# EAGLE board HorusBoard (EAGLE 8.4.1)
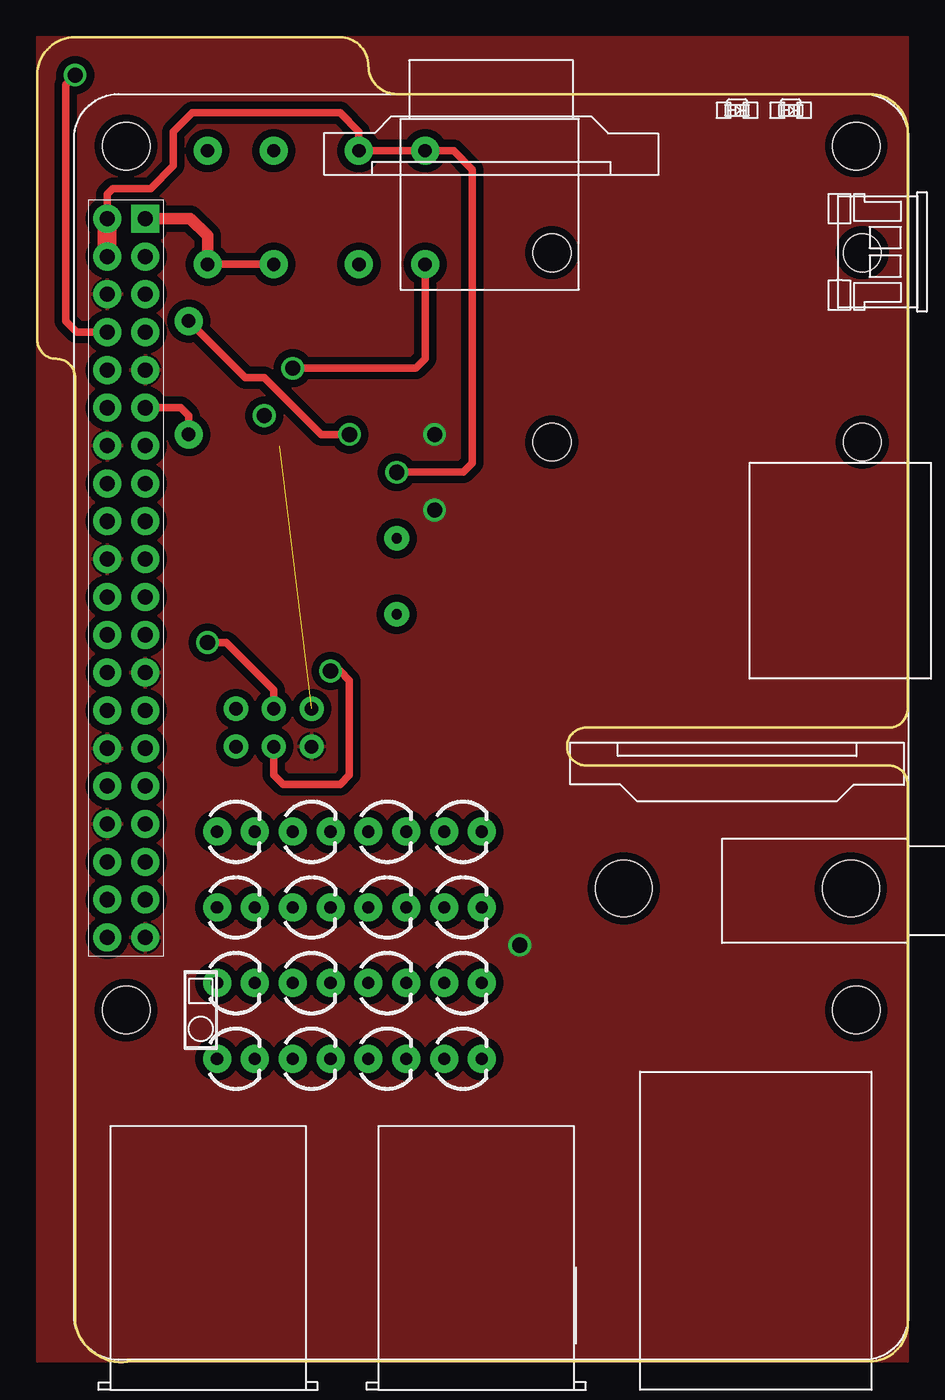
[diagram p0: board, top side]
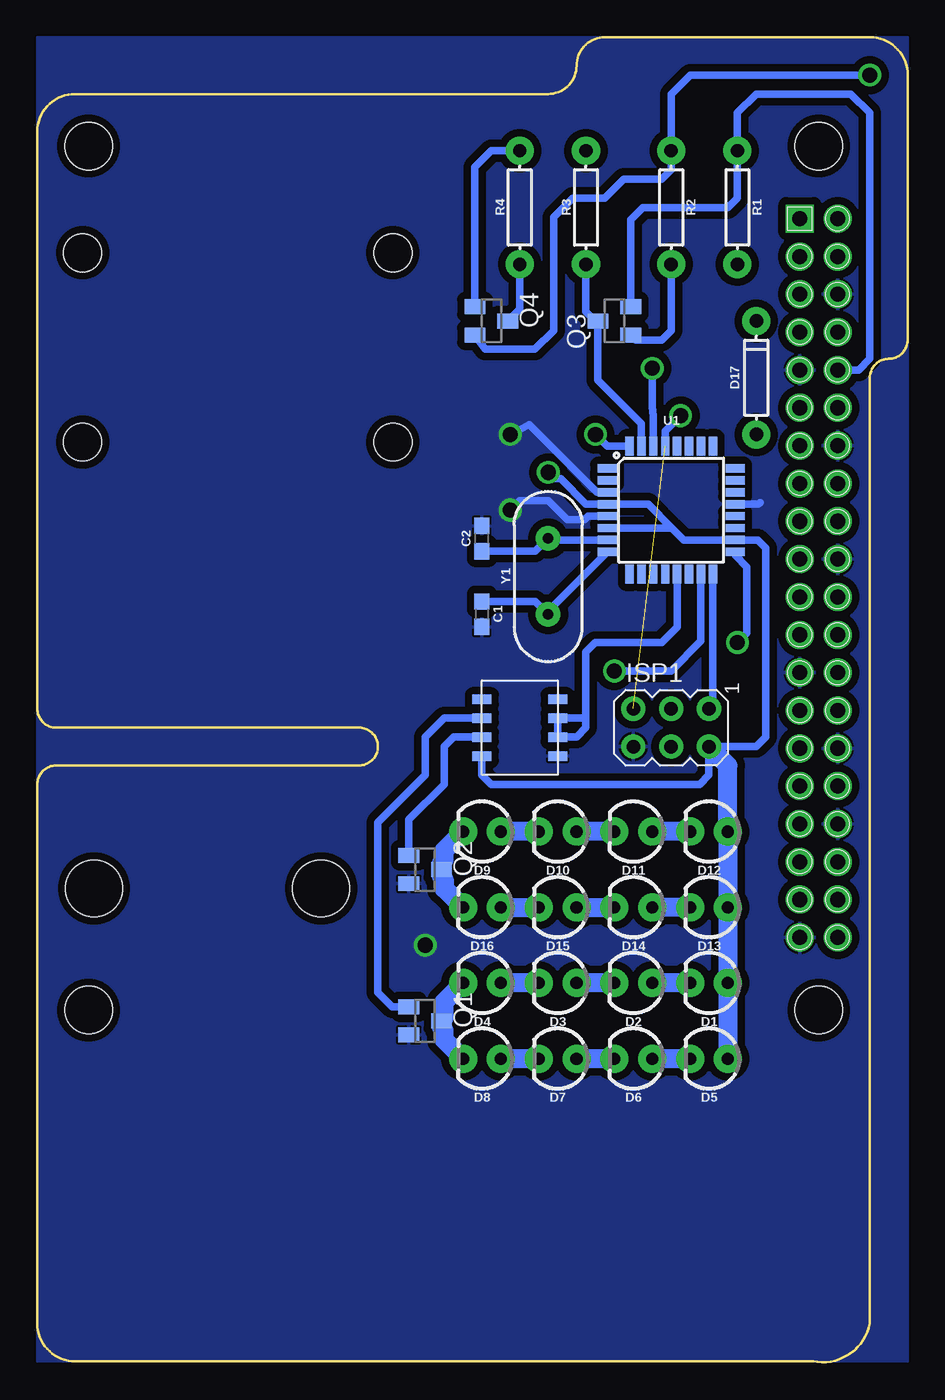
[diagram p1: board, bottom side, seen from below]

Size 58.42 x 88.96 mm. Coordinates in mm from the lower left corner, seen from the top.
Outline: 6.35,0.06 arc-90 2.54,2.6 2.54,66.1 arc90 1.27,67.37 arc-90 0,68.64 0,86.42 arc-90 2.54,88.96 20.32,88.96 arc-90 22.22,87.06 arc90 24.13,85.15 55.88,85.15 arc-90 58.42,82.61 58.42,43.88 arc-90 57.15,42.61 36.83,42.61 arc90 35.56,41.34 arc90 36.83,40.07 57.15,40.07 arc-90 58.42,38.8 58.42,2.6 arc-90 55.88,0.06 6.35,0.06
Copper layers (1*16): Top 0.035mm / dielectric 1.5mm / Bottom 0.035mm
Design rules "OthermillDRC_30_deg_v2": minimum track width 6mil, minimum drill 0.8mm, track to track 6mil, track to pad 6mil, pad to pad 6mil, via to via 6mil, smd to smd 0mil, copper to edge 0mil, drill to drill 6mil, minimum pad ring 10mil, minimum via ring 10mil, stop-mask expansion 1mil, vias tented up to drill 30mil, thermal gap 6mil
Holes 3.81 mm at 54.61,31.81 39.37,31.81
Holes 2.54 mm at 55.37,74.48 34.54,74.48 34.54,61.78 55.37,61.78

## Footprints (pad centres in the part's own frame; a part is rotated, then mirrored left to right if it is on the bottom)
0603 = smd 1.1 x 1: 1 -0.85,0; 2 0.85,0
LED_3MM = drill 0.813 pad 1.88: A -1.27,0; K 1.27,0
DIODE-1N4148 = drill 0.9 pad 1.88: A -3.81,0; C 3.81,0
AVRISP = drill 0.9 pad 1.626: 1 -1.27,2.54; 2 1.27,2.54; 3 -1.27,0; 4 1.27,0; 5 -1.27,-2.54; 6 1.27,-2.54
SOT23 = smd 1 x 1.4: 1 -0.95,-1.1; 2 0.95,-1.1; 3 0,1.1
AXIAL-0.3 = drill 0.9 pad 1.88: P$1 -3.81,0; P$2 3.81,0
TQFP32-08 = smd 1.27 x 0.559: 1 -4.293,2.8; 2 -4.293,2; 3 -4.293,1.2; 4 -4.293,0.4; 5 -4.293,-0.4; 6 -4.293,-1.2; 7 -4.293,-2; 8 -4.293,-2.8; 17 4.293,-2.8; 18 4.293,-2; 19 4.293,-1.2; 20 4.293,-0.4; 21 4.293,0.4; 22 4.293,1.2; 23 4.293,2; 24 4.293,2.8 | smd 0.559 x 1.27: 9 -2.8,-4.293; 10 -2,-4.293; 11 -1.2,-4.293; 12 -0.4,-4.293; 13 0.4,-4.293; 14 1.2,-4.293; 15 2,-4.293; 16 2.8,-4.293; 25 2.8,4.293; 26 2,4.293; 27 1.2,4.293; 28 0.4,4.293; 29 -0.4,4.293; 30 -1.2,4.293; 31 -2,4.293; 32 -2.8,4.293
8-SOIC = smd 1.27 x 0.635: P$1 -2.54,1.27; P$2 -2.54,0; P$3 -2.54,-1.27; P$4 -2.54,-2.54; P$5 2.54,-2.54; P$6 2.54,-1.27; P$7 2.54,0; P$8 2.54,1.27
RASPBERRY_PI_3 = drill 1.016 pad 1.88 square: 1 -23.24,32.27 | drill 1.016 pad 1.88: 2 -25.78,32.27; 3 -23.24,29.73; 4 -25.78,29.73; 5 -23.24,27.19; 6 -25.78,27.19; 7 -23.24,24.65; 8 -25.78,24.65; 9 -23.24,22.11; 10 -25.78,22.11; 11 -23.24,19.57; 12 -25.78,19.57; 13 -23.24,17.03; 14 -25.78,17.03; 15 -23.24,14.49; 16 -25.78,14.49; 17 -23.24,11.95; 18 -25.78,11.95; 19 -23.24,9.41; 20 -25.78,9.41; 21 -23.24,6.87; 22 -25.78,6.87; 23 -23.24,4.33; 24 -25.78,4.33; 25 -23.24,1.79; 26 -25.78,1.79; 27 -23.24,-0.75; 28 -25.78,-0.75; 29 -23.24,-3.29; 30 -25.78,-3.29; 31 -23.24,-5.83; 32 -25.78,-5.83; 33 -23.24,-8.37; 34 -25.78,-8.37; 35 -23.24,-10.91; 36 -25.78,-10.91; 37 -23.24,-13.45; 38 -25.78,-13.45; 39 -23.24,-15.99; 40 -25.78,-15.99 | hole 3.175: -24.51,37.14; 24.49,37.14; 24.49,-20.86; -24.51,-20.86
HC49US = drill 0.7 pad 1.651: 1 -2.54,0; 2 2.54,0

## Placement (x,y rotation side)
C1  22pF  [0603]  28.57,50.23 270 bottom
C2  22pF  [0603]  28.57,55.31 90 bottom
D1  [LED_3MM]  13.34,25.46 180 bottom
D2  [LED_3MM]  18.41,25.46 180 bottom
D3  [LED_3MM]  23.49,25.46 180 bottom
D4  [LED_3MM]  28.57,25.46 180 bottom
D5  [LED_3MM]  13.34,20.38 180 bottom
D6  [LED_3MM]  18.41,20.38 180 bottom
D7  [LED_3MM]  23.49,20.38 180 bottom
D8  [LED_3MM]  28.57,20.38 180 bottom
D9  [LED_3MM]  28.57,35.62 180 bottom
D10  [LED_3MM]  23.49,35.62 180 bottom
D11  [LED_3MM]  18.41,35.62 180 bottom
D12  [LED_3MM]  13.34,35.62 180 bottom
D13  [LED_3MM]  13.34,30.54 180 bottom
D14  [LED_3MM]  18.41,30.54 180 bottom
D15  [LED_3MM]  23.49,30.54 180 bottom
D16  [LED_3MM]  28.57,30.54 180 bottom
D17  200mA/100V/1V  [DIODE-1N4148]  10.16,66.1 90 bottom
ISP1  AVRISP-6  [AVRISP]  15.88,42.61 270 bottom
Q1  [SOT23]  32.38,22.92 270 bottom
Q2  [SOT23]  32.38,33.08 270 bottom
Q3  [SOT23]  19.68,69.91 90 bottom
Q4  [SOT23]  27.94,69.91 270 bottom
R1  1k  [AXIAL-0.3]  11.43,77.53 270 bottom
R2  1k  [AXIAL-0.3]  15.88,77.53 270 bottom
R3  1k  [AXIAL-0.3]  21.59,77.53 90 bottom
R4  1k  [AXIAL-0.3]  26.04,77.53 90 bottom
U1  ATMEGA328P_TQFP  [TQFP32-08]  15.88,57.21 0 bottom
U$1  TC4427  [8-SOIC]  26.04,41.97 180 bottom
U$2  RASPBERRY_PI_3  [RASPBERRY_PI_3]  30.48,44.51 0 top
Y1  16MHz  [HC49US]  24.13,52.77 90 bottom

## Library data of the parts
C1 C2 = SparkFun-Capacitors; PROD_ID: CAP-07876
D1-D16 = SparkFun-LED; PROD_ID: DIO-08794
D17 = SparkFun-DiscreteSemi; PROD_ID: DIO-08378
ISP1 Q1-Q4 = adafruit
R1-R4 = SparkFun-Resistors; PROD_ID: RES-08380
U1 = SparkFun-IC-Microcontroller; PROD_ID: IC-09069
U$1 U$2 = owen
Y1 = SparkFun-Clocks; PROD_ID: XTAL-08181; SF_ID: COM-00536

## Nets
3.3V: Q3.1 R1.P$2 R2.P$2 U$2.1
5V: D1.A D5.A D12.A D13.A ISP1.2 Q4.1 R3.P$2 R4.P$2 U1.4 U1.6 U1.18 U$1.P$8 U$2.2 U$2.4
GND: C1.2 C2.2 ISP1.6 Q1.2 Q2.2 U1.3 U1.5 U1.21 U$1.P$1 U$2.6 U$2.9 U$2.14 U$2.20 U$2.25 U$2.30 U$2.34 U$2.39
LIGHT: U1.13 U$1.P$2 U$1.P$3
MISO: ISP1.1 U1.16
MOSI: ISP1.4 U1.15
N$1: D4.K D8.K Q1.3
N$2: D9.K D16.K Q2.3
N$3: Q1.1 U$1.P$6
N$4: D17.A U$2.11
N$5: Q2.1 U$1.P$7
N$7: U1.20
N$9: C2.1 U1.7 Y1.2
N$10: C1.1 U1.8 Y1.1
N$11: D1.K D2.A
N$12: D2.K D3.A
N$13: D3.K D4.A
N$14: D7.K D8.A
N$15: D9.A D10.K
N$16: D6.K D7.A
N$17: D10.A D11.K
N$18: D14.K D15.A
N$19: D15.K D16.A
N$20: D11.A D12.K
N$21: D5.K D6.A
N$22: D13.K D14.A
N$23: D17.C U1.32
RESET: ISP1.5 U1.29
RX_3.3V: Q3.2 R1.P$1 U$2.10
RX_5V: Q4.3 R4.P$1 U1.30
SCK: ISP1.3 U1.17
TX_3.3V: Q4.2 R2.P$1 U$2.8
TX_5V: Q3.3 R3.P$1 U1.31

## Tracks (layer width: path | path; a pad name or v marks a point on that pad's centre or on a via)
3.3V
  Top 0.508: R1.P$2 R2.P$2
  Top 0.762: U$2.1 10.28,76.78 11.43,75.63 R1.P$2
  Bottom 0.508: R2.P$2 15.88,69.28 16.51,68.64 18.27,68.64 Q3.1
5V  (via drill 1.02)
  Top 0.508: U$2.2 4.7,78.42 5.07,78.8 7.61,78.8 9.14,80.33 9.14,82.61 10.41,83.88 20.32,83.88 21.59,82.61 R3.P$2 R4.P$2 27.94,81.34 29.21,80.07 29.21,60.39 28.57,59.75 v24.13,59.75
  Top 1.27: U$2.4 U$2.2
  Bottom 0.508: Q4.1 29.04,80.24 27.94,81.34 R4.P$2 | 15.82,56.01 U1.6 | 15.82,56.01 15.02,55.21 U1.18 10.07,55.21 9.53,54.67 9.53,41.97 10.16,41.34 ISP1.2 13.34,39.43 13.97,38.8 27.94,38.8 28.57,39.43 U$1.P$8 | 15.82,56.01 17.42,57.61 U1.4 20.4,57.61 20.4,57.62 21.59,57.62 23.29,59.32 23.7,59.32 v24.13,59.75
  Bottom 1.27: ISP1.2 12.07,40.07 D12.A D13.A D1.A D5.A
GND  (via drill 1.02)
  Bottom 0.508: U1.21 10.01,57.61 9.91,57.72 | U1.5 21.44,56.81 21.68,56.58 22.86,56.58 24.13,57.85 26.04,57.85 v26.67,57.21 | 22.22,59.75 22.2,59.75 20.86,58.41 U1.3 | 21.89,59.45 25.4,62.96 v26.67,62.29
  other vias: 32.38,28
  pour Bottom (isolate 0.508): 0,0.06 0,88.96 58.42,88.96 58.42,0.06
  pour Top (isolate 0.508): 0,0.06 0,88.96 58.42,88.96 58.42,0.06
LIGHT
  Bottom 0.508: U1.13 15.48,49.36 16.51,48.32 20.95,48.32 21.59,47.69 21.59,43.24 | 21.59,43.24 21.59,42.61 22.22,41.97 U$1.P$2 U$1.P$3 21.59,43.24
MISO
  Bottom 0.508: U1.16 13.07,44.14 ISP1.1
MOSI  (via drill 1.02)
  Top 0.508: ISP1.4 15.88,39.43 16.51,38.8 20.32,38.8 20.95,39.43 20.95,45.78 20.32,46.42 v19.68,46.42
  Bottom 0.508: v19.68,46.42 15.88,46.42 13.88,48.42 U1.15
N$1
  Bottom 1.27: D4.K 31.11,24.19 31.11,23.09 Q1.3 31.29,22.46 31.11,22.29 31.11,21.65 D8.K
N$2
  Bottom 1.27: D9.K 31.11,34.35 31.11,33.72 31.29,33.55 Q2.3 31.29,32.62 31.11,32.45 31.11,31.81 D16.K
N$3
  Bottom 0.508: U$1.P$6 31.11,43.24 32.38,41.97 32.38,39.43 35.56,36.26 35.56,24.83 34.6,23.87 Q1.1
N$4
  Top 0.508: U$2.11 9.64,64.08 10.16,63.56 D17.A
N$5
  Bottom 0.508: U$1.P$7 30.48,41.97 31.11,41.34 31.11,38.8 33.48,36.43 Q2.1
N$9
  Bottom 0.508: U1.7 24.04,55.21 Y1.2 24.98,54.46 C2.1
N$10
  Bottom 0.508: U1.8 24.13,50.45 Y1.1 24.98,51.08 C1.1
N$11
  Bottom 1.27: D1.K D2.A
N$12
  Bottom 1.27: D2.K D3.A
N$13
  Bottom 1.27: D3.K D4.A
N$14
  Bottom 1.27: D7.K D8.A
N$15
  Bottom 1.27: D10.K D9.A
N$16
  Bottom 1.27: D6.K D7.A
N$17
  Bottom 1.27: D11.K D10.A
N$18
  Bottom 1.27: D15.A D14.K
N$19
  Bottom 1.27: D16.A D15.K
N$20
  Bottom 1.27: D12.K D11.A
N$21
  Bottom 1.27: D5.K D6.A
N$22
  Bottom 1.27: D13.K D14.A
N$23  (via drill 1.02)
  Top 0.508: D17.C 13.97,66.1 15.24,66.1 19.05,62.29 v20.95,62.29
  Bottom 0.508: v20.95,62.29 20.17,61.51 U1.32
RESET  (via drill 1.02)  (1 unrouted)
  Bottom 0.508: U1.29 16.27,62.53 v15.24,63.56
RX_3.3V
  Bottom 0.508: Q3.2 18.59,76.73 17.78,77.53 12.07,77.53 11.43,78.17 R1.P$1 11.43,83.88 10.16,85.15 3.81,85.15 2.54,83.88 2.54,67.37 3.29,66.62 U$2.10
RX_5V  (via drill 1.02)
  Top 0.508: R4.P$1 26.04,67.37 25.4,66.74 v17.14,66.74
  Bottom 0.508: Q4.3 26.04,70.72 R4.P$1 | v17.14,66.74 17.14,64.2 17.07,63.49 U1.30
SCK  (via drill 1.02)
  Top 0.508: v11.43,48.32 12.7,48.32 15.88,45.15 ISP1.3
  Bottom 0.508: U1.17 11.58,54.19 10.8,53.4 10.8,48.96 v11.43,48.32
TX_3.3V  (via drill 1.02)
  Top 0.508: v2.54,86.42 1.91,85.79 1.91,69.91 2.66,69.16 U$2.8
  Bottom 0.508: Q4.2 28.34,68.01 25.02,68.01 23.75,69.28 23.75,76.9 22.48,78.17 20.32,78.17 19.05,79.44 16.51,79.44 15.88,80.07 R2.P$1 15.88,85.15 14.61,86.42 v2.54,86.42
TX_5V
  Bottom 0.508: R3.P$1 21.59,70.55 20.95,69.91 Q3.3 20.79,65.93 17.88,63.02 U1.31